# EAGLE board main_brd (EAGLE 6.4)
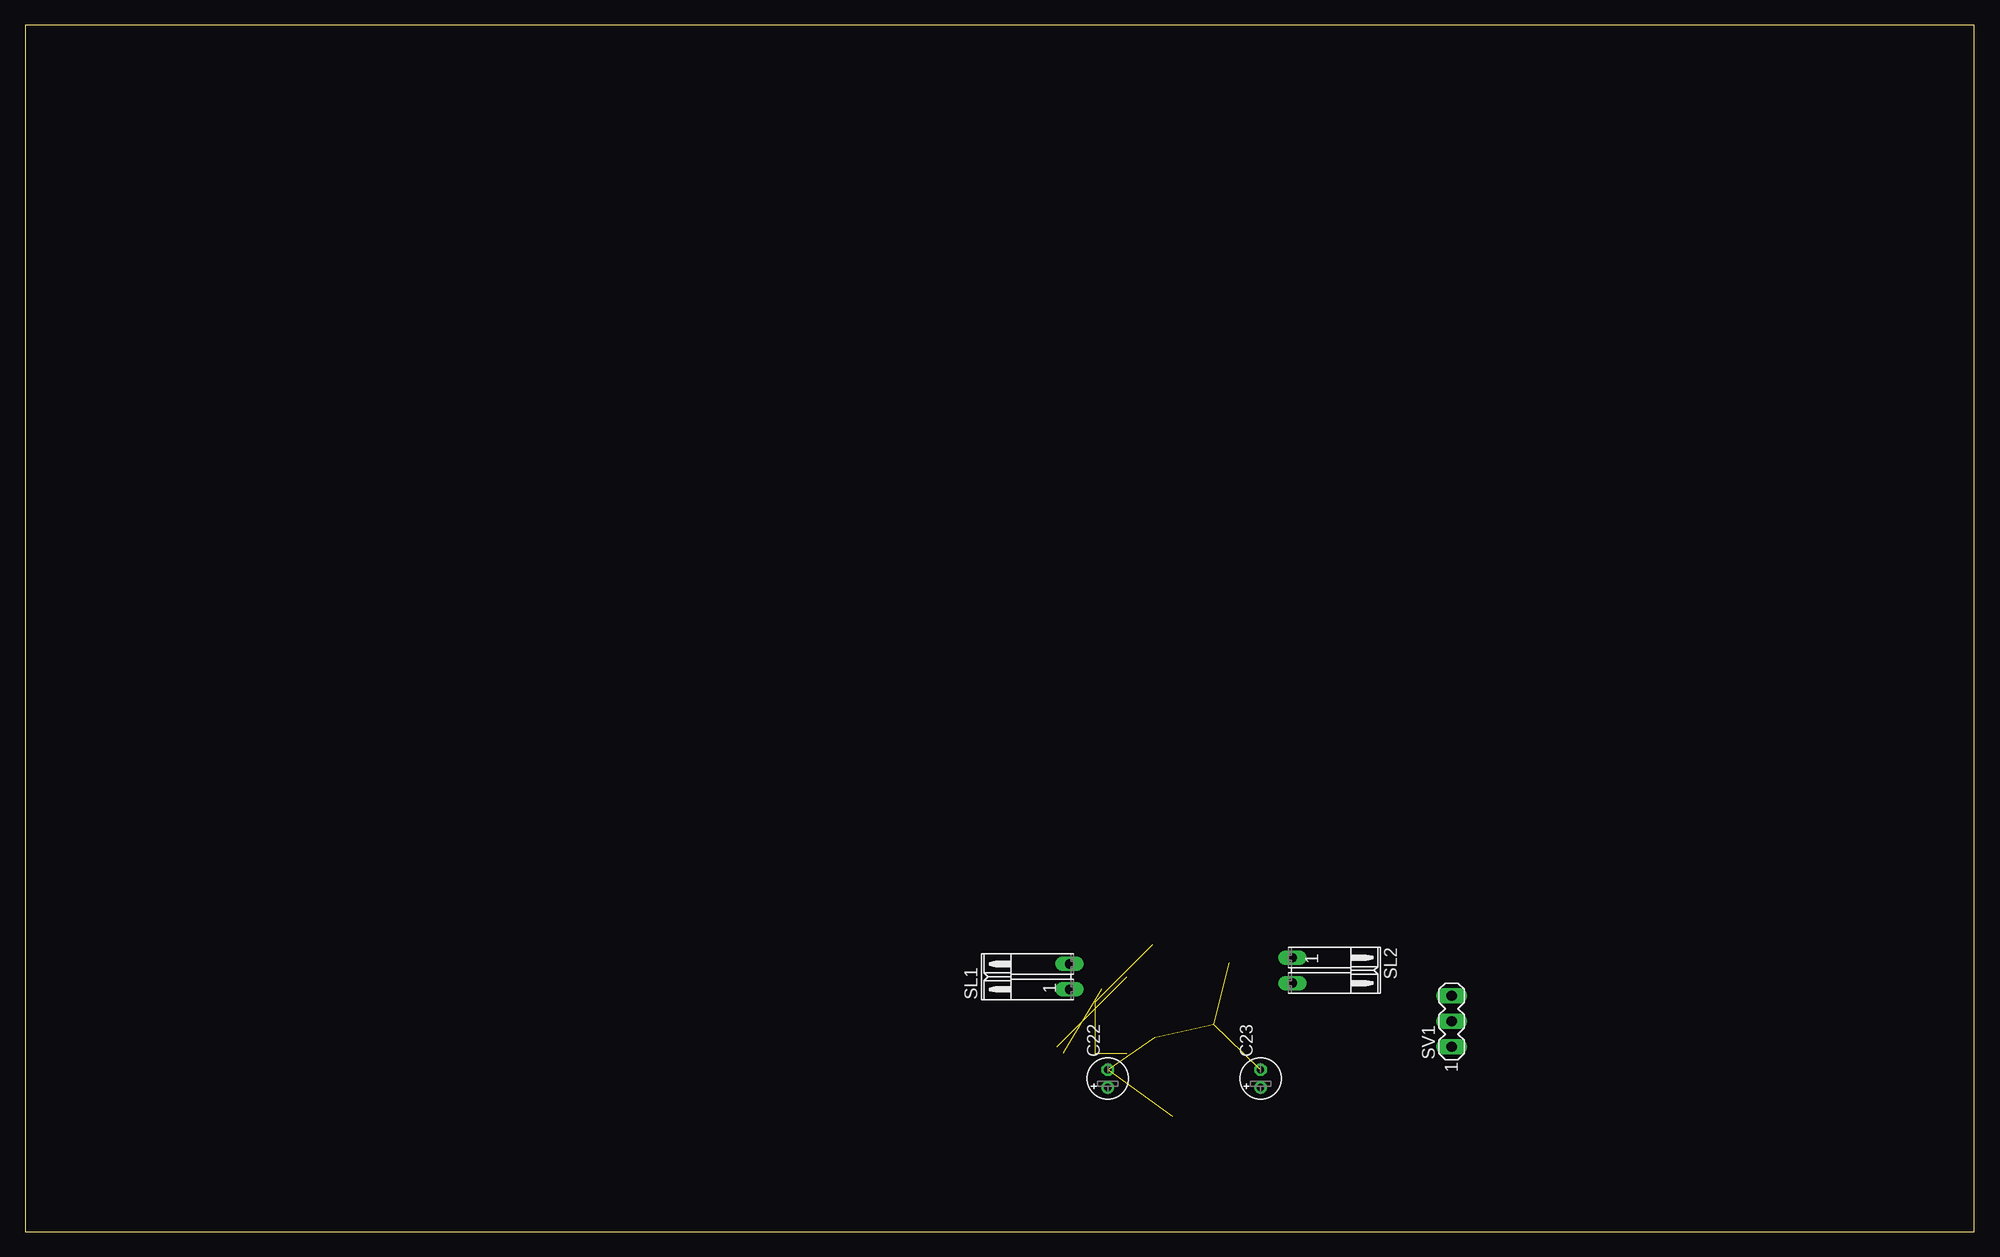
[diagram p0: board, top side]
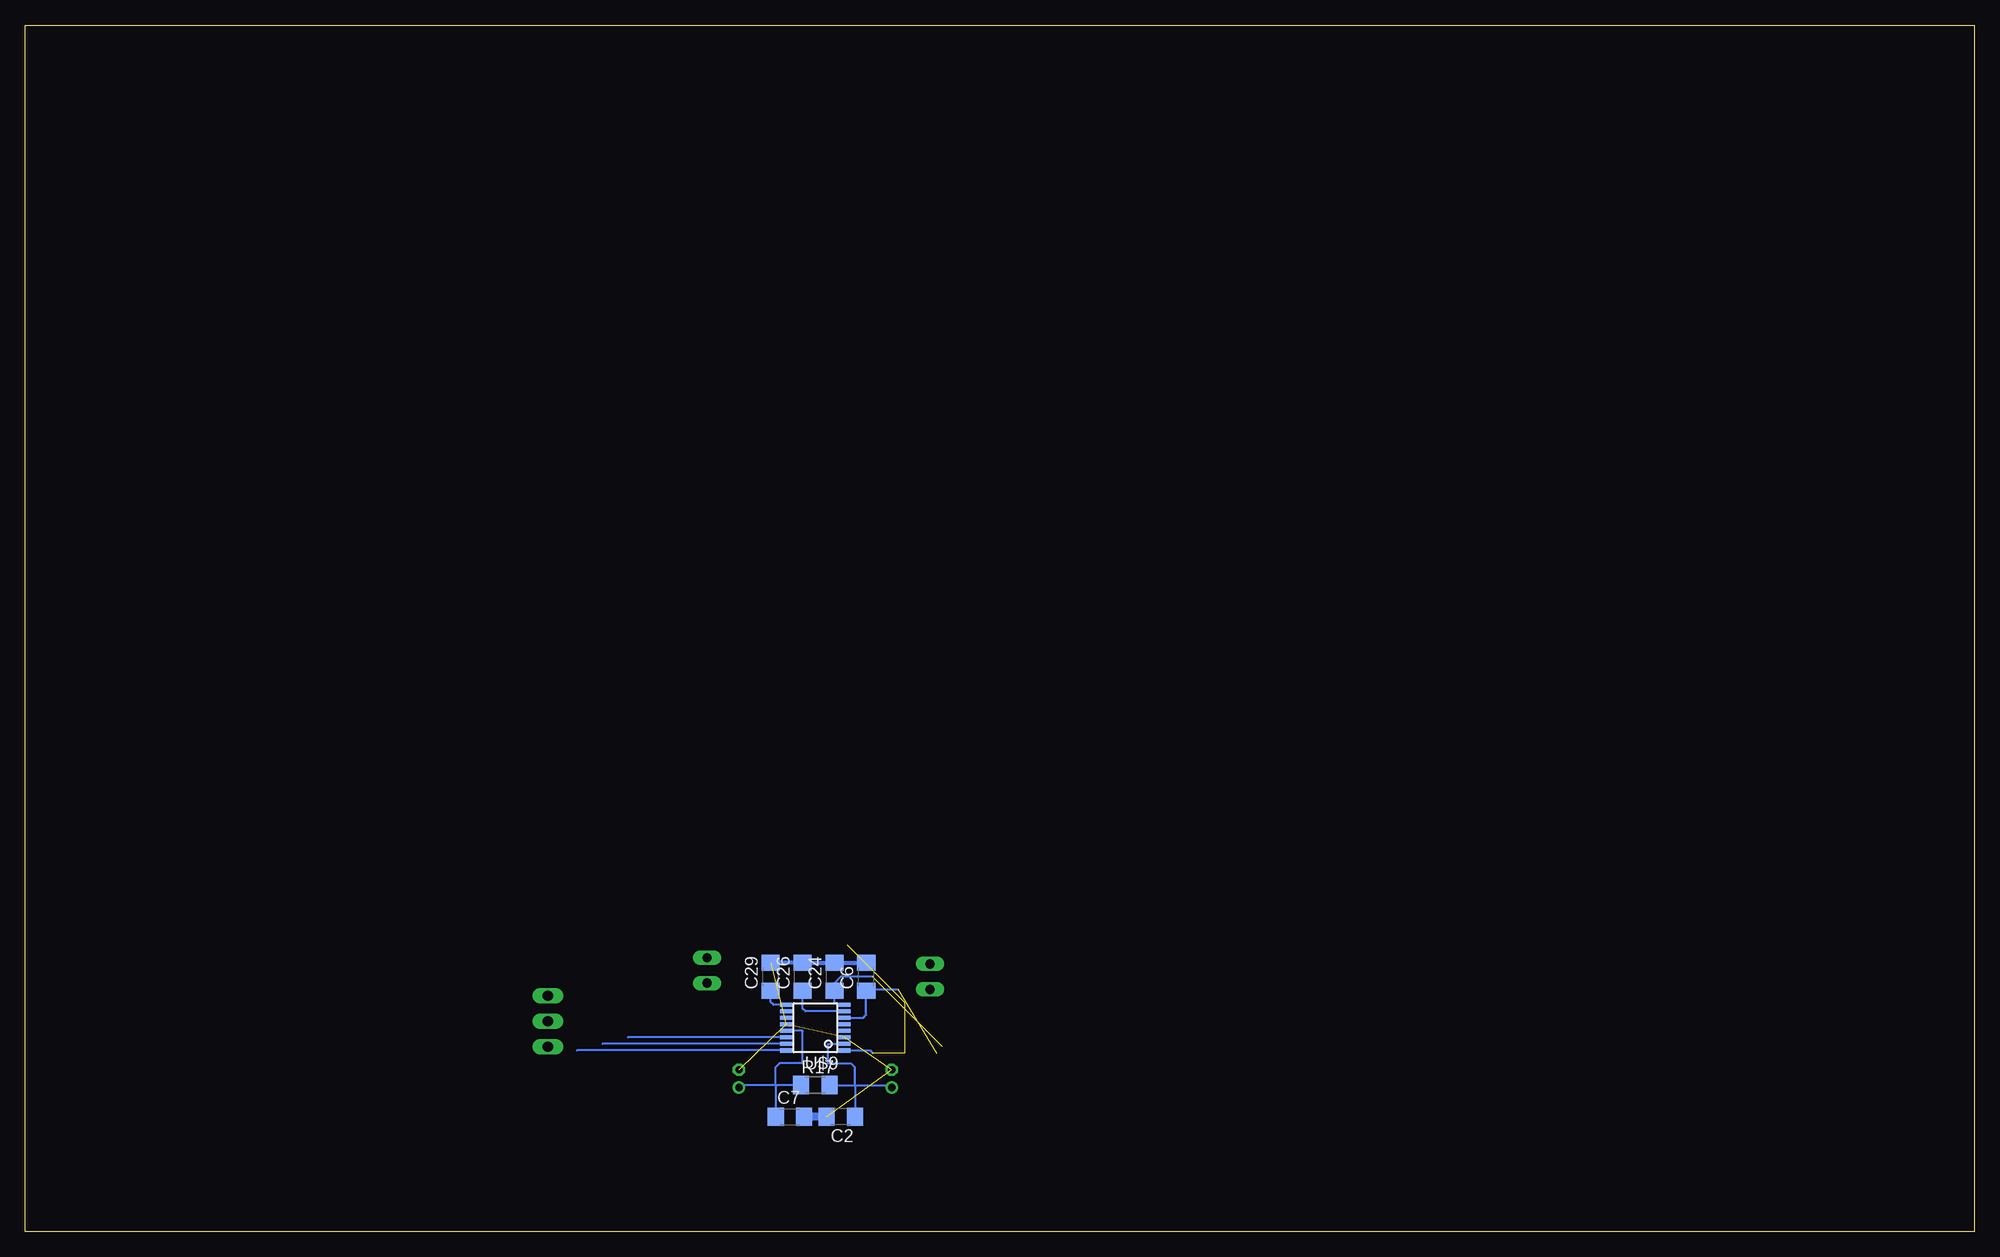
[diagram p1: board, bottom side, seen from below]

Size 194.36 x 120.26 mm. Coordinates in mm from the lower left corner, seen from the top.
Outline: 0,0 194.36,0 194.36,120.26 0,120.26 0,0
Copper layers (1*16): Top 0.035mm / dielectric 1.5mm / Bottom 0.035mm
Design rules "default": minimum track width 10mil, minimum drill 24mil, track to track 8mil, track to pad 8mil, pad to pad 8mil, via to via 8mil, smd to smd 8mil, copper to edge 40mil, drill to drill 8mil, minimum pad ring 10mil, minimum via ring 8mil, stop-mask expansion 4mil, vias tented up to drill 0mil, thermal gap 10mil

## Footprints (pad centres in the part's own frame; a part is rotated, then mirrored left to right if it is on the bottom)
C1206 = smd 1.6 x 1.8: 1 -1.4,0; 2 1.4,0
E1,8-4 = drill 0.711 pad 1.168: + -0.889,0 | drill 0.711 pad 1.168 octagon: - 0.889,0
R1206 = smd 1.6 x 1.803: 1 -1.422,0; 2 1.422,0
02PA = drill 0.914 long: 1 -1.27,0; 2 1.27,0
MA03-1 = drill 1.016 long: 1 -2.54,0; 2 0,0; 3 2.54,0
R-PDSO-G16 = smd 0.4 x 1.2: 1 -2.275,-2.9; 2 -1.625,-2.9; 3 -0.975,-2.9; 4 -0.325,-2.9; 5 0.325,-2.9; 6 0.975,-2.9; 7 1.625,-2.9; 8 2.275,-2.9; 9 2.275,2.9; 10 1.625,2.9; 11 0.975,2.9; 12 0.325,2.9; 13 -0.325,2.9; 14 -0.975,2.9; 15 -1.625,2.9; 16 -2.275,2.9

## Placement (x,y rotation side)
C2  0.1uF  [C1206]  113.03,11.43 180 bottom
C6  1nF  [C1206]  110.49,25.4 90 bottom
C7  0.1uF  [C1206]  118.11,11.43 0 bottom
C22  1uF  [E1,8-4]  107.95,15.24 90 top
C23  1uF  [E1,8-4]  123.19,15.24 90 top
C24  1nF  [C1206]  113.67,25.4 90 bottom
C26  1nF  [C1206]  116.84,25.4 90 bottom
C29  1nF  [C1206]  120.02,25.4 90 bottom
R17  51  [R1206]  115.57,14.61 0 bottom
SL1  [02PA]  104.14,25.4 90 top
SL2  [02PA]  126.36,26.04 270 top
SV1  [MA03-1]  142.24,20.95 90 top
U$9  ADC128S052QCMT  [R-PDSO-G16]  115.57,20.32 90 bottom

## Library data of the parts
C2 C6 C7 C24 C26 C29 = rcl
C22 C23 R17 = resistor
SL1 SL2 = con-amp-quick; OC_FARNELL: unknown; OC_NEWARK: unknown
SV1 = con-lstb; OC_FARNELL: unknown; OC_NEWARK: unknown
U$9 = kamal

## Nets
GND: C2.2 C6.2 C7.2 C22.- C23.- C24.2 C26.2 C29.2 U$9.3 U$9.12
IN0: U$9.4
IN1: U$9.5
IN2: C6.1 U$9.6
IN3: C26.1 U$9.7
IN4: C24.1 U$9.8
IN5: C29.1 U$9.9
IN6: U$9.10
IN7: U$9.11
MISO_H: U$9.15
MOSI_H: U$9.14
SCK_H: U$9.16
SS_H_1: U$9.1
VA: C2.1 C22.+ R17.2 U$9.2
VD: C7.1 C23.+ R17.1 U$9.13

## Tracks (layer width: path | path; a pad name or v marks a point on that pad's centre or on a via)
GND  (5 unrouted)
  Bottom 0.406: C6.2 C24.2 C26.2 C29.2
  Bottom 0.813: C2.2 C7.2
IN2  (1 unrouted)
  Bottom 0.203: U$9.6 110.78,21.3 110.49,21.59 C6.1 | 110.49,24.13 C6.1 | C6.1 110.36,24.13 107.31,24.13
IN3
  Bottom 0.203: U$9.7 116.56,21.95 116.84,22.23 C26.1
IN4  (1 unrouted)
  Bottom 0.203: U$9.8 113.4,22.59 113.67,22.86 C24.1 113.67,24.77 113.03,25.4 109.86,25.4
IN5
  Bottom 0.203: U$9.9 119.75,22.59 120.02,22.86 C29.1
MISO_H
  Bottom 0.203: U$9.15 136.81,18.7
MOSI_H
  Bottom 0.203: U$9.14 134.28,19.34
SCK_H
  Bottom 0.203: U$9.16 139.33,18.05
SS_H_1  (4 unrouted)
  Bottom 0.203: U$9.1 110.12,18.05 109.86,17.78
VA
  Bottom 0.203: U$9.2 114.3,18.7 114.3,16.76 112.01,16.76 111.63,16.38 111.63,14.61 | 111.63,14.61 C2.1 | R17.2 111.63,14.61 | 111.63,14.61 108.2,14.61 C22.+
VD
  Bottom 0.203: U$9.13 116.84,20 116.84,16.76 119.13,16.76 119.51,16.38 119.51,14.61 | R17.1 119.38,14.61 | 119.38,14.61 119.51,14.61 | 119.51,14.61 119.51,14.47 | 119.51,14.47 C7.1 | 119.51,14.47 119.38,14.61 | 119.51,14.61 122.94,14.61 C23.+